# Altium PCB PCB1.PcbDoc
Units mm, origin at the board's own origin, x right, y up, seen from the top; angles counter-clockwise.
Board outline 90 x 47 mm, 2 copper layers (Top Layer, Bottom Layer); 78 components, 46 nets, 190 pads, 86 vias.
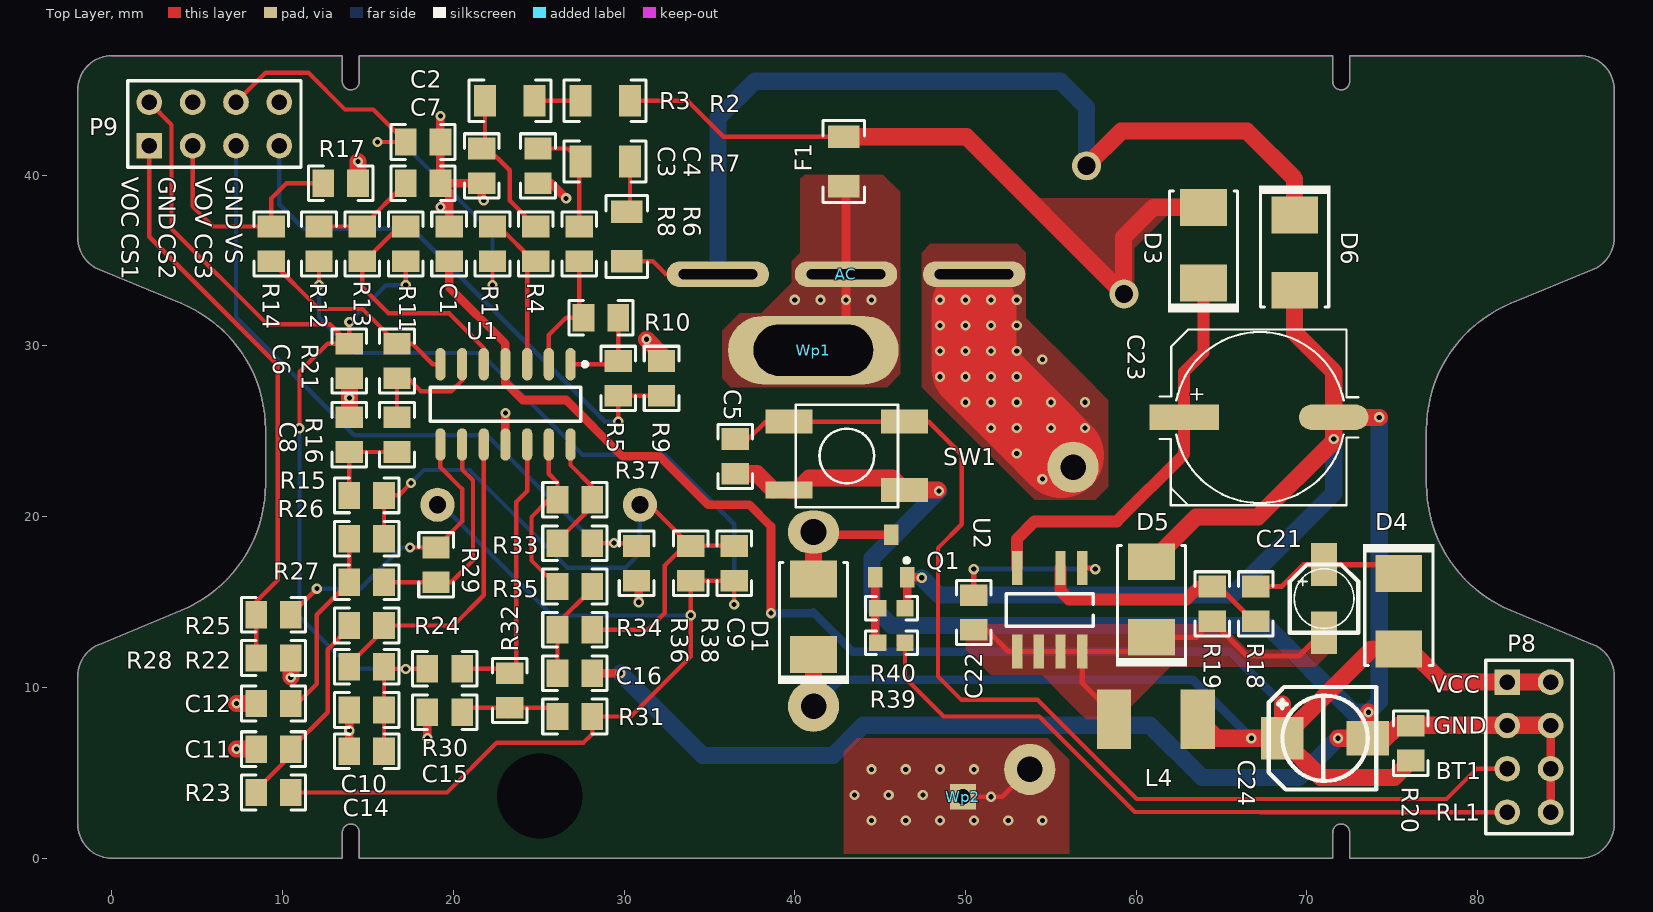
[diagram p0: Top Layer view]
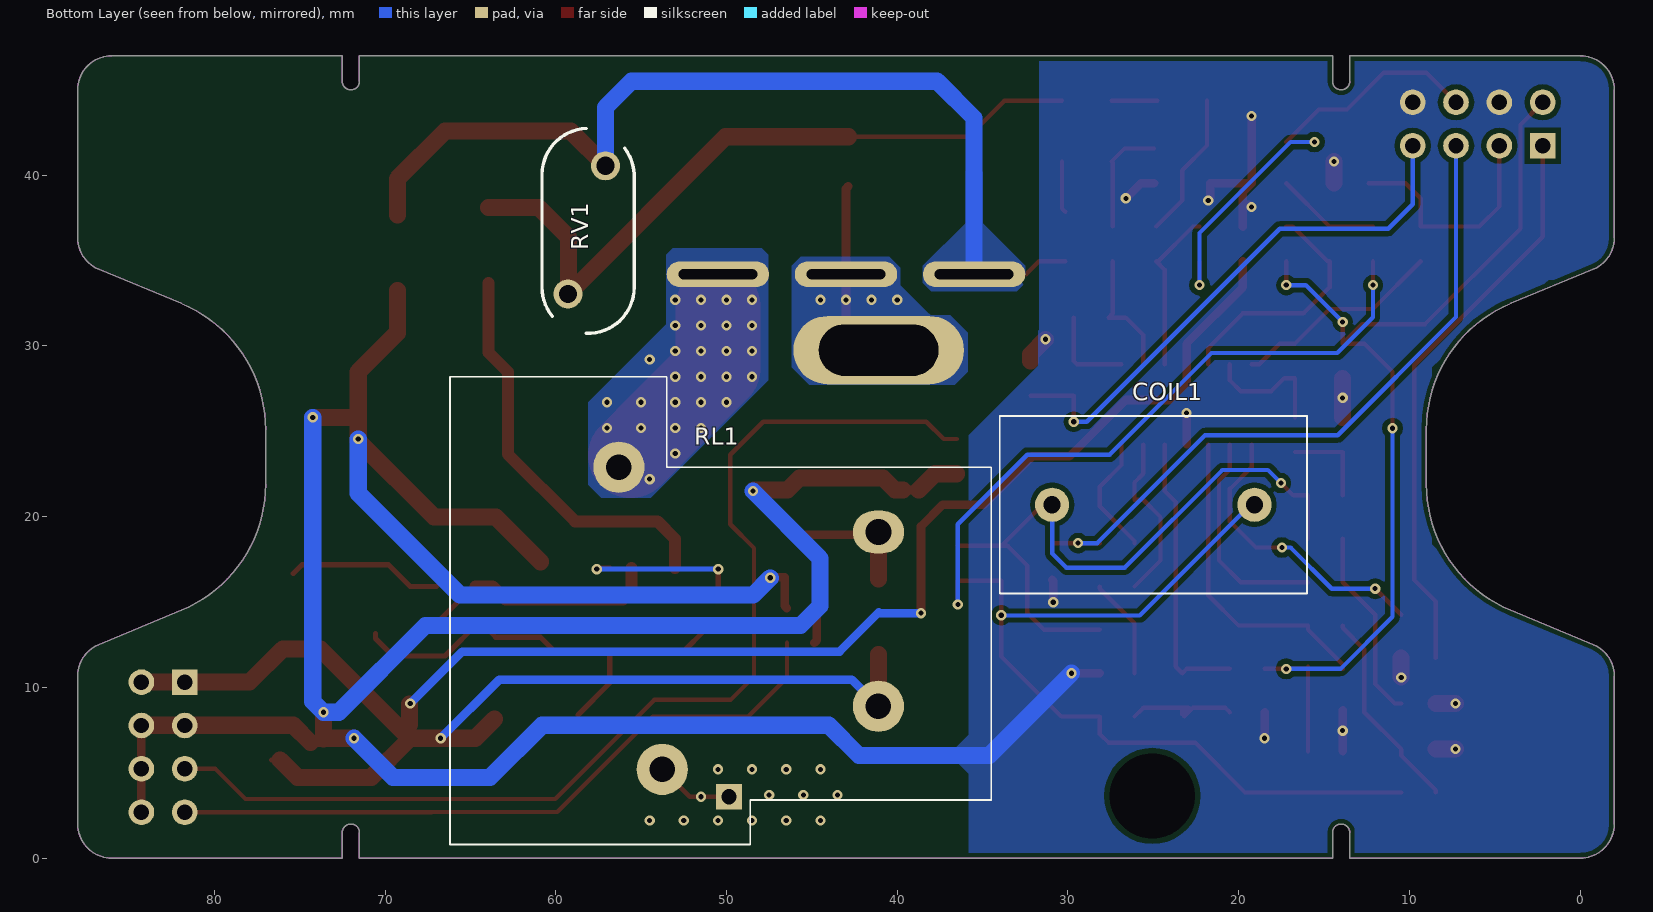
[diagram p1: Bottom Layer view, seen from below]

## Layer stack, top to bottom
Top Solder: solder mask 0.0102, Solder Resist, Dk 3.5
Top Layer: signal copper 0.0356
Dielectric 1: dielectric 0.32, FR-4, Dk 4.8
Bottom Layer: signal copper 0.0356
Bottom Solder: solder mask 0.0102, Solder Resist, Dk 3.5

## Board outline
0,0 cw(c0,2) -2,2 -2,10.664 cw(c0,10.664) -0.765,12.511 4.061,14.511 ccw(c1,21.902) 9,21.902 9,25.098 ccw(c1,25.098) 4.061,32.489 -0.765,34.489 cw(c0,36.336) -2,36.336 -2,45 cw(c0,45) 0,47 13.5,47 13.5,45.5 ccw(c14,45.5) 14.5,45.5 14.5,47 71.5,47 71.5,45.5 ccw(c72,45.5) 72.5,45.5 72.5,47 86,47 cw(c86,45) 88,45 88,36.336 cw(c86,36.336) 86.765,34.489 81.939,32.489 ccw(c85,25.098) 77,25.098 77,21.902 ccw(c85,21.902) 81.939,14.511 86.765,12.511 cw(c86,10.664) 88,10.664 88,2 cw(c86,2) 86,0 72.5,0 72.5,1.5 ccw(c72,1.5) 71.5,1.5 71.5,0 14.5,0 14.5,1.5 ccw(c14,1.5) 13.5,1.5 13.5,0

## Design rules (kind name [scope] priority, off if disabled: settings)
Clearance [All] p1: gap=0.254
HoleSize [All] p1: absolutevalues=TRUE maxlimit=5 minlimit=0.01 maxpercent=80.000 minpercent=20.000
PolygonConnect [All] p1: connectstyle=Direct reliefconductorwidth=0.254 reliefentries=4 polygonreliefangle="90 Angle" airgapwidth=0.254
RoutingVias [All] p1: holewidth=0.3 width=0.6 viastyle="Through Hole" minholewidth=0.3 minwidth=0.6 maxholewidth=5 maxwidth=5
SilkToSilkClearance [All] p1: silktosilkclearance=0.1
SilkToSolderMaskClearance [IsPad] p1: minsilkscreentomaskgap=0.01 clearancetoexposedcopper=TRUE
SolderMaskExpansion [All] p1: expansion=0.102
Width [All] p1: maxlimit=5 minlimit=0.254 preferedwidth=0.254
27 further rules are at their usual default settings.

## Components (designator, comment, footprint, x,y, rotation, side; value= is the part's Value field where it differs from the comment)
AC "Header 3" CHAN3DONG 35.5,34.2 r0 top
C1 "104" 0805_HV 19.752,35.978 r270 top
C2 "104" 0805_HV 18.228,41.947 r180 top
C3 "221" 0805_HV 21.657,40.55 r90 top
C4 "221" 0805_HV 24.959,40.55 r90 top
C5 "221" 0805_HV 36.516,23.532 r90 top
C6 "104" 0805_HV 13.91,29.12 r90 top
C7 "221" 0805_HV 18.228,39.534 r180 top
C8 "221" 0805_HV 13.91,24.802 r270 top
C9 "221" 0805_HV 36.449,17.272 r270 top
C10 "104" 0805_HV 14.926,8.673 r0 top
C11 "221" 0805_HV 9.465,6.387 r0 top
C12 "221" 0805_HV 9.465,9.054 r0 top
C14 "104" 0805_HV 14.926,6.26 r0 top
C15 "221" 0805_HV 19.498,8.546 r0 top
C16 "221" 0805_HV 27.118,10.832 r180 top
C21 "10uF" TU_NHOM_10uF_MH 71,15.2 r180 top
C22 "104" 0805_HV 50.486,14.388 r90 top
C23 "400AX6R8M8x11" PANACAP-G-GENERIC 67.25,25.818 r0 top
C24 "220uF" TU_NHOM_2.5_MH 71.06,7.022 r90 top
COIL1 "Header 2" CURRENT_COIL 30.925,20.698 r180 bottom locked
D1 "US1M-13-F" SMB 41.088,14.134 r270 top
D3 "US1M-13-F" SMB 63.948,35.902 r270 top
D4 "US1M-13-F" SMB 75.378,14.464 r90 top
D5 "US1M-13-F" SMB 60.9,15.15 r270 top
D6 "US1M-13-F" SMB 69.282,35.47 r90 top
F1 "Res" 1206 42.866,40.804 r90 top
L4 "680uF" "Inductor 4.5x5" 60.9,8.038 r180 top
P8 "Header 4X2" HDR2X4 81.73,10.31 r270 top
P9 "Header 4X2" HDR2X4 2.189,41.729 r0 top locked
Q1 "C1815" SOT23B 45.66,17.69 r180 top
R1 "22K" 0805_HV 22.292,35.978 r270 top
R2 "1.2M" 1206 28.896,44.36 r180 top
R3 "1.2M" 1206 23.308,44.36 r180 top
R4 "2.2K" 0805_HV 24.832,35.978 r90 top
R5 "10K" 0805_HV 29.658,28.104 r90 top
R6 "1.2M" 1206 30.166,36.412 r90 top
R7 "1.2M" 1206 28.896,40.804 r180 top
R8 "2.2K" 0805_HV 27.372,35.978 r90 top
R9 "10K" 0805_HV 32.198,28.104 r90 top
R10 "22K" 0805_HV 28.642,31.66 r180 top
R11 "22K" 0805_HV 17.212,35.978 r270 top
R12 "1.2M" 0805_HV 12.132,35.978 r270 top
R13 "2.2K" 0805_HV 14.672,35.978 r90 top
R14 "10K" 0805_HV 9.338,35.978 r270 top
R15 "1.2M" 0805_HV 14.926,21.246 r0 top
R16 "2.2K" 0805_HV 16.704,24.802 r270 top
R17 "10K" 0805_HV 13.402,39.534 r0 top
R18 "13k" 0805_HV 66.996,14.896 r90 top
R19 "2K" 0805_HV 64.456,14.896 r90 top
R20 "3k3" 0805_HV 76.073,6.731 r270 top
R21 "22K" 0805_HV 16.704,29.12 r270 top
R22 "22K" 0805_HV 14.926,11.213 r0 top
R23 "1K" 0805_HV 9.465,3.847 r0 top
R24 "1K" 0805_HV 14.926,13.626 r180 top
R25 "10K" 0805_HV 9.465,14.261 r0 top
R26 "1K" 0805_HV 14.926,18.706 r0 top
R27 "1K" 0805_HV 14.926,16.166 r180 top
R28 "10K" 0805_HV 9.465,11.721 r0 top
R29 "22K" 0805_HV 18.99,17.182 r270 top
R30 "22K" 0805_HV 19.498,11.086 r180 top
R31 "1.2M" 0805_HV 27.118,8.292 r0 top
R32 "2.2K" 0805_HV 23.308,9.816 r270 top
R33 "10K" 0805_HV 27.118,18.452 r180 top
R34 "1.2M" 0805_HV 27.118,13.372 r0 top
R35 "2.2K" 0805_HV 27.118,15.912 r0 top
R36 "10K" 0805_HV 30.734,17.272 r270 top
R37 "22K" 0805_HV 27.118,20.992 r180 top
R38 "1K" 0805_HV 33.909,17.272 r90 top
R39 "1K" 0603 45.66,12.61 r180 top
R40 "10K" 0603 45.66,14.642 r0 top
RL1 "Component_1" RELAY30ASLA12VDC 56.3,22.9 r180 bottom locked
RV1 "S10K275E2" VAR_S10K275E2 58.106,36.74 r270 bottom
SW1 "PB SW" Switch-PB-6.2x6.3mm-SMD 43.047,23.564 r180 top locked
U1 "LM324" D014_L 23.054,26.58 r270 top
U2 "LNK306" "SOP 7" 56.836,17.002 r270 top
Wp1 "Socket" PIN1#1 42.104,50.964 r0 top
Wp2 "Socket" PIN1#2 52.391,-6.567 r0 top

## Footprints (in the part's own frame and the unit in brackets; to place one, negate y for a bottom-side part, rotate by r counter-clockwise, add the part's x,y. Pads: shape width x height; smd on the part's side, far side on the other; paste and mask are expansions set on the pad)
0603 [mm] "0603 from SM-752 data"
  rect 1x0.95 smd: 1(-0.8,0) 2(0.8,0)
  silkscreen extent -1.52,-0.69 1.52,0.69, body extent -0.87,-0.47 0.87,0.47, height 1
0805_HV [mil] "0805 with 30mil clearance between pads"
  rect 50x63 smd: 1(-40,0) 2(40,0)
  silkscreen extent -74,-40 74,40, body extent -43,-29 43,29, height 57
1206 [mm] "1206 from SM-752 data"
  rect 1.3x1.85 smd: 1(1.45,0) 2(-1.45,0)
  silkscreen extent -2.4,-1.21 2.4,1.21, body extent -1.7,-0.9 1.7,0.9, height 1.35
CHAN3DONG [mm]
  oval 6x1.5 hole 0.6 slot 4.6 at 0 deg: 1(0,0) 2(7.5,0) 3(15,0)
CURRENT_COIL [mm]
  round 2 hole 1 paste+0 mask+0: 1(0,0) 2(11.85,0)
  silkscreen extent -3.08,-5.2 14.93,5.2
D014_L [mm] "14-Pin Small Outline Integrated Circuit 1.27 mm Pitch, IPC High Density"
  oval 1.9x0.6 smd: 1(-2.35,3.81) 2(-2.35,2.54) 3(-2.35,1.27) 4(-2.35,0) 5(-2.35,-1.27) 6(-2.35,-2.54) 7(-2.35,-3.81) 8(2.35,-3.81) 9(2.35,-2.54) 10(2.35,-1.27) 11(2.35,0) 12(2.35,1.27) 13(2.35,2.54) 14(2.35,3.81)
  silkscreen extent -2.47,-4.4 1,4.79, body extent -1.95,-4.33 1.95,4.33, height 1.75
HDR2X4 [mm] "Connector; Header; 4x2 Position"
  rect 1.5x1.5 hole 0.9: 1(0,0)
  round 1.5 hole 0.9: 2(0,2.54) 3(2.54,0) 4(2.54,2.54) 5(5.08,0) 6(5.08,2.54) 7(7.62,0) 8(7.62,2.54)
  silkscreen extent -1.27,-1.27 8.89,3.81
"Inductor 4.5x5" [mm]
  rect 2x3.5 smd: 1(2.2,-0.1) 2(-2.7,-0.1)
  body extent -2.6,-2.6 2.2,2.2, height 2
PANACAP-G-GENERIC [mil]
  rect 160x59.06 smd: 1(-175,0)
  oval 160x59.06 smd: 2(170,0)
  silkscreen extent -231,-203 227,203, body extent -233,-203 223,203, height 402
PIN1#1 [mm] "Connector; Plug"
  oval 10x4 hole 3 slot 7 at 0 deg: 1(-1.016,-21.209)
PIN1#2 [mm] "Connector; Plug"
  rect 1.5x1.5 hole 0.9: 1(-2.54,10.16)
RELAY30ASLA12VDC [mm]
  oval 3x2.5 hole 1.5 paste+0 mask+0: 1(15.202,-3.8)
  round 3 hole 1.5 paste+0 mask+0: 2(15.2,-14) 3(2.54,-17.7) 4(0,0)
  silkscreen extent -9.9,-22.1 21.8,5.3
SMB [mm] "Molded Diode, 2-Leads, Body 5.4x3.6mm, IPC Medium Density, based on OnSemi component dimensions"
  rect 2.159x2.743 smd: 1(2.21,0) 2(-2.21,0)
  silkscreen extent -3.18,-2.08 3.94,2.08, body extent -2.7,-1.8 2.7,1.8, height 2.32
"SOP 7" [mm]
  rect 2x0.6 smd: 1(0,0) 2(0,-1.27) 4(0,-3.81) 5(4.9,-3.81) 6(4.9,-2.54) 7(4.9,-1.27) 8(4.9,0)
  silkscreen extent 1.52,-4.44 3.43,0.64
SOT23B [mm] "SOT 23B"
  rect 0.85x1.2 smd: 1(0.95,1.25) 2(0,-1.25) 3(-0.94,1.245)
  silkscreen extent -1.02,0.13 -0.77,0.38, body extent -1.5,-1.2 1.5,1.3, height 1.06
Switch-PB-6.2x6.3mm-SMD [mm]
  rect 2.75x1.4 smd: 1(-3.375,2) 2(-3.375,-2) 2(3.375,-2)
  rect 2.75x1 smd: 1(3.375,2)
  silkscreen extent -3,-3 3,3, body extent -4,-3 4,3.3, height 3.1
TU_NHOM_2.5_MH [mm]
  rect 2.5x2.5 smd: 1(0,2.5)
  rect 2x2.5 smd: 2(0,-2.5)
  silkscreen extent -3,-3 3,3.3, body extent -3.3,-3.5 3.3,3.5, height 8.11
TU_NHOM_10uF_MH [mm]
  rect 1.5x2.5 smd: 1(0,-2) 2(0,2)
  silkscreen extent -2,-2 2,2, body extent -2.15,-2.5 2.15,2.5, height 5.4
VAR_S10K275E2 [mm] "EPCOS"
  round 1.7 hole 1.067: 1(-3.81,1.016) 2(3.69,-1.184)
  silkscreen extent -6,-2.7 6,2.7, body extent -6.02,-2.7 5.98,2.7, height 15

## Part data
AC: "Header, 3-Pin"
C1 C2 C3 C4 C5 C6 C7 C8 C9 C10 C11 C12 C14 C15 C16 C22: library part CM, "Cap SMD"
C21: library part TU_NHOM_10uF_25V_MH, "TU_NHOM_10uF_25V_MH"
C23: "CAP, AL, 6.8uF, 400V, +/-20%, TH"
C24: library part TU_NHOM_220uF_25V_MH, "TU_NHOM_220uF_25V_MH"
COIL1: "Header, 2-Pin"
D1 D3 D4 D5 D6: library part MURS160-13-F, "Diode, Ultrafast, 600V, 1A, SMB"
F1: library part Res-SMD, "Resistor"
L4: library part "Inductor 4.5x5_MH"
P8 P9: "Header, 4-Pin, Dual row"
Q1: "NPN 600mW, ECB"
R1 R2 R3 R4 R5 R6 R7 R8 R9 R10 R11 R12 R13 R14 R15 R16 R17 R18 R19 R20 R21 R22 R23 R24 R25 R26 R27 R28 R29 R30 R31 R32 R33 R34 R35 R36 R37 R38 R39 R40: library part R, "Resistor 1/4W"
RV1: "Varistor 275V RMS 10MM Radial, TH"
SW1: library part Switch-PB-6.2x6.3mm-SMD, "Tactile Switch, SPNO, SMD, 160gf, 6.2x6.3x2.5mm"
U1: library part LM324_MH, "Op x 4"
U2: library part Component_1

## Free pads (board coordinates)
  round 3 hole 5 paste+0 mask+0: 4(25.061,3.644)

## Via types
v1: diameter 0.6, hole 0.3, Top Layer to Bottom Layer, tented both sides, 86 vias

## Nets (pads, with @x,y where several pads share a name; then routed paths per layer and width w, separated by ;. In a path a pad name is that pad's centre, name@x,y a point inside that pad or via, vN(x,y) a via of type N, cw(c..) or ccw(c..) an arc to the next point about the centre after c; other vN are vias at no path point)
BP: C22.2 U2.1 | length 9.4
  Top Layer w0.3: C22.2 v1(50.486,16.928) ; U2.1 57.524,17.002 v1(57.598,16.928)
  Bottom Layer w0.3: v1(50.486,16.928) v1(57.598,16.928)
BUTTON1: C5.2 P8.5 SW1.2 | length 65.1
  Top Layer w0.254: C5.2 37.278,24.548 38.294,25.564 39.672,25.564 46.422,25.564 47.842,25.564 49.784,23.622 49.784,19.558 48.387,18.161 48.387,10.645 49.761,9.271 54.229,9.271 60.034,3.466 78.172,3.466 79.936,5.23 P8.5
C1: R14.2 R21.1 U1.7 | length 12.4
  Top Layer w0.254: R14.2 12.132,32.168 14.672,32.168 R21.1 17.593,30.136 18.799,28.93 U1.7
C2: R25.2 R29.1 U1.8 | length 17.3
  Top Layer w0.254: R25.2 v1(12.005,15.785) ; v1(17.466,18.198) R29.1 20.514,19.722 20.514,21.627 19.244,22.897 U1.8
  Bottom Layer w0.254: v1(12.005,15.785) 14.545,15.785 16.958,18.198 v1(17.466,18.198)
C3: R33.2 R37.1 U1.14 | length 7.1
  Top Layer w0.254: R33.2 26.102,18.579 28.134,20.611 R37.1 28.134,21.754 26.864,23.024 U1.14
CUR_N: C9.1 COIL1.1 R15.2 R26.2 R34.2 R38.2 | length 40.2
  Top Layer w0.254: R26.2 R15.2 16.801,21.246 v1(17.526,21.971) ; R34.2 31.406,13.372 32.385,14.351 32.385,17.145 33.528,18.288 R38.2 ; COIL1.1@30.925,20.637 COIL1.1 31.499,20.698 R38.2 ; C9.1 R38.2
  Bottom Layer w0.254: v1(17.526,21.971) 18.288,22.733 20.955,22.733 26.67,17.018 30.099,17.018 30.925,17.844 COIL1.1 COIL1.1@30.925,21.122
CUR_P: C9.2 COIL1.2 R12.2 R23.2 R31.2 R38.1 | length 91
  Top Layer w0.254: R23.2 19.625,3.847 22.546,6.768 27.626,6.768 28.134,7.276 R31.2 30.39,8.292 33.909,11.811 v1(33.909,14.224) R38.1 C9.2 v1(36.449,14.859) ; v1(12.132,33.565) R12.2 ; COIL1.2@18.781,20.992 COIL1.2
  Bottom Layer w0.254: v1(12.132,33.565) 12.132,31.683 14.224,29.591 21.59,29.591 27.559,23.622 32.385,23.622 36.449,19.558 v1(36.449,14.859) ; COIL1.2 19.307,20.698 25.79,14.215 33.9,14.215 v1(33.909,14.224)
CURRENT_SIGNAL1: P9.1 R25.1 R28.1 | length 33.7
  Top Layer w0.254: P9.1 2.189,36.396 9.719,28.866 9.719,16.293 8.449,15.023 R25.1 R28.1
CURRENT_SIGNAL2: P9.3 R14.1 R17.1 | length 13.7
  Top Layer w0.254: P9.3 4.729,38.174 5.909,36.994 R14.1 9.338,38.645 10.227,39.534 R17.1
CURRENT_SIGNAL3: P9.5 R33.1 R36.1 | length 40.5
  Top Layer w0.254: R33.1 v1(29.404,18.452) 30.801,18.452 R36.1@30.928,18.325
  Bottom Layer w0.254: P9.5 7.269,31.697 14.201,24.765 21.971,24.765 28.284,18.452 v1(29.404,18.452)
FB: R18.1 R19.2 U2.2 | length 14.1
  Top Layer w0.3: R19.2@64.71,15.912 64.837,15.912 66.869,13.88 R18.1
  Top Layer w0.7: U2.2 55.566,15.658 56.074,15.15 62.932,15.15 63.694,15.912 R19.2@64.71,15.912
GND: C1.1 C2.1 C3.1 C4.1 C5.1 C6.1 C7.1 C8.1 C10.1 C11.1 C12.1 C14.1 C15.1 C16.1 C23.2 C24.2 D5.2 D6.2 P8.3 P8.4 P8.6 P8.8 P9.4 P9.8 Q1.3 R9.2 R17.2 R20.1 R28.2 R36.2 R40.2 SW1.1 U1.11 | length 230
  Top Layer w0.5: C14.1 v1(13.91,7.467) C10.1 ; v1(18.482,7.022) C15.1 ; v1(19.244,38.137) 19.371,38.264 19.752,38.264 ; v1(19.244,43.471) C2.1 C7.1 ; C1.1 19.752,38.264 ; v1(21.784,38.518) 21.657,38.645 C3.1 C7.1 ; U1.11 v1(23.054,26.072) ; C4.1 25.721,39.534 v1(26.61,38.645) ; C16.1 v1(29.785,10.832) ; v1(30.861,14.986) 30.861,16.226 R36.2@30.928,16.293 ; SW1.1@38.738,21.564 SW1.1@39.672,21.564 ; R40.2 46.6,14.782 Q1.3 47.413,16.445 v1(47.438,16.42) ; v1@48.39,21.564 v1(48.454,21.5) ; D5.2 61.078,17.36 63.694,19.976 ; C24.2@73.6,6.982 73.814,6.768 C24.2@74.362,6.768 ; P8.8 P8.6 P8.4 ; C7.1 19.752,39.026 19.752,38.264
  Top Layer w1: v1(7.306,6.387) C11.1 ; v1(7.306,9.054) C12.1 ; v1@10.481,10.608 R28.2 ; C8.1 v1(13.91,26.961) C6.1 ; R17.2 v1(14.418,40.804) ; v1(31.309,30.39) 32.198,29.501 R9.2 ; C5.1 37.786,22.516 SW1.1@38.738,21.564 ; SW1.1@39.672,21.564 40.136,21.564 40.834,22.262 45.724,22.262 46.422,21.564 v1@48.39,21.564 ; D5.2 63.516,19.976 63.694,19.976 67.123,19.976 71.568,24.421 v1(71.568,24.548) C23.2 ; D6.2 69.282,30.771 71.568,28.485 C23.2 ; v1(71.822,7.022) C24.2 ; C24.2@73.6,6.982 v1(73.6,8.546) ; v1(74.235,25.818) C23.2 ; C24.2@74.362,6.768 75.378,7.784 76.013,7.784 84.256,7.784 P8.4
  Bottom Layer w1: v1(29.785,10.832) 34.611,6.006 42.231,6.006 44.009,7.784 60.796,7.784 63.844,4.736 69.536,4.736 v1(71.822,7.022) ; v1(47.438,16.42) 48.454,15.404 65.599,15.404 71.568,21.373 v1(71.568,24.548) ; v1(48.454,21.5) 44.517,17.563 44.517,14.769 45.66,13.626 67.631,13.626 72.711,8.546 v1(73.6,8.546) 74.235,9.181 v1(74.235,25.818)
  other v1: 10.481,10.578
L: AC.2 F1.2 Wp1.1 | length 10.4
  Top Layer w0.5: Wp1.1 43,31.667 v1(43,32.7) AC.2 43,39.22 F1.2
  other v1: 40,32.7 41.5,32.7 44.5,32.7
L1: AC.3 RL1.4 | length 10.8
  Top Layer w5: 50.5,32.295 50.5,31.2 50.5,28.7 52,27.2 53.75,25.45 RL1.4@55.617,23.583
  other v1: 54.5,22.2 53,23.7 51.5,25.2 53,25.2 55,25.2 57,25.2 50,26.7 51.5,26.7 53,26.7 55,26.7 57,26.7 48.5,28.2 50,28.2 51.5,28.2 53,28.2 54.5,29.2 48.5,29.7 50,29.7 51.5,29.7 53,29.7 48.5,31.2 50,31.2 51.5,31.2 53,31.2 48.5,32.7 50,32.7 51.5,32.7 53,32.7
LL: D3.2 F1.1 R2.2 RV1.2 | length 42.3
  Top Layer w0.254: R2.2 33.722,44.36 35.828,42.254 F1.1
  Top Layer w1: F1.1 50.052,42.254 59.256,33.05 59.256,36.366 61.002,38.112 D3.2
LOUT: RL1.3 Wp2.1 | length 4.6
  Top Layer w0.254: Wp2.1 v1(51.5,3.593) 52.153,3.593 RL1.3
  other v1: 44.5,2.2 46.5,2.2 48.5,2.2 50.5,2.2 52.5,2.2 54.5,2.2 43.5,3.7 45.5,3.7 47.5,3.7 44.5,5.2 46.5,5.2 48.5,5.2 50.5,5.2
N: AC.1 D6.1 R6.2 RV1.1 | length 57.6
  Top Layer w0.254: R6.2 31.69,34.962 32.452,34.2 AC.1
  Top Layer w1: RV1.1 59.122,42.582 66.488,42.582 69.282,39.788 D6.1
  Bottom Layer w1: AC.1 35.5,43.344 37.659,45.503 55.566,45.503 57.09,43.979 RV1.1
NetC3_2: C3.2 R3.1 R4.2 | length 8.6
  Top Layer w0.254: R3.1 21.858,41.746 23.308,40.296 23.308,38.518 R4.2
NetC4_2: C4.2 R7.1 R8.2 | length 6.5
  Top Layer w0.254: C4.2 26.684,41.566 R7.1 ; R8.2 R7.1@27.372,40.73
NetC7_2: C7.2 R12.1 R13.2 | length 6.1
  Top Layer w0.254: R12.1 R13.2 C7.2
NetC8_2: C8.2 R15.1 R16.2 | length 5.3
  Top Layer w0.254: R15.1 C8.2 R16.2
NetC11_2: C11.2 R23.1 R24.2 | length 12
  Top Layer w0.254: R23.1 8.449,3.974 10.481,6.006 C11.2 12.64,8.546 12.64,12.229 13.91,13.499 R24.2
NetC12_2: C12.2 R26.1 R27.2 | length 11.3
  Top Layer w0.254: C12.2 10.862,9.054 12.005,10.197 12.005,14.261 R27.2 R26.1
NetC15_2: C15.2 R31.1 R32.2 | length 7.3
  Top Layer w0.254: C15.2 20.768,8.8 22.673,8.8 R32.2@23.181,8.292 ; R32.2 23.308,8.419 22.927,8.8 25.594,8.8 R31.1
NetC16_2: C16.2 R34.1 R35.2 | length 5.9
  Top Layer w0.254: C16.2 R34.1 26.102,13.753 28.134,15.785 R35.2
NetC21_1: C21.1 D4.1 R18.2 | length 9.1
  Top Layer w0.3: R18.2 68.52,15.912 69.79,17.182 74.87,17.182 D4.1
NetD1_2: D1.2 Q1.2 RL1.1 | length 7.4
  Top Layer w0.5: D1.2 D1.2@41.098,16.354 ; RL1.1 41.258,18.94 Q1.2
  Top Layer w1: D1.2@41.098,16.354 RL1.1
NetQ1_1: Q1.1 R39.2 R40.1 | length 3.9
  Top Layer w0.5: Q1.1 44.71,12.76 R39.2
NetR1_1: R1.1 R4.1 U1.3 | length 9.6
  Top Layer w0.254: R1.1 22.673,36.994 24.705,34.962 R4.1 24.324,34.454 U1.3
NetR2_1: R2.1 R3.2 | length 2.7
  Top Layer w0.254: R3.2 R2.1
NetR6_1: R6.1 R7.2 | length 3
  Top Layer w0.254: R6.1 30.346,38.042 R7.2
NetR8_1: R8.1 R10.2 U1.2 | length 7.6
  Top Layer w0.254: U1.2 25.594,30.644 26.61,31.66 R10.2 27.372,31.914 R8.1
NetR11_1: R11.1 R13.1 U1.5 | length 14.4
  Top Layer w0.254: R11.1 16.831,36.994 14.799,34.962 R13.1 14.672,33.438 16.196,31.914 19.752,31.914 21.784,29.882 U1.5
NetR16_1: R16.1 R21.2 U1.6 | length 7.6
  Top Layer w0.254: R16.1 R21.2 17.339,28.104 18.101,27.342 19.879,27.342 20.514,27.977 U1.6
NetR22_1: R22.1 R24.1 U1.10 | length 18.8
  Top Layer w0.254: R22.1@13.91,11.086 13.91,11.34 15.942,13.372 R24.1 20.006,13.626 21.784,15.404 U1.10
NetR27_1: R27.1 R29.2 U1.9 | length 12.8
  Top Layer w0.254: R27.1 R29.2 19.879,16.166 21.149,17.436 21.149,22.135 20.514,22.77 U1.9
NetR30_1: R30.1 R32.1 U1.12 | length 16.7
  Top Layer w0.254: R30.1 23.054,11.086 R32.1 23.689,11.213 23.689,20.865 24.324,21.5 U1.12
NetR35_1: R35.1 R37.2 U1.13 | length 10.1
  Top Layer w0.254: U1.13 25.594,22.516 26.102,22.008 R37.2 25.594,20.992 24.578,19.976 24.578,17.436 R35.1
RL1C: P8.7 R39.1 | length 40.6
  Top Layer w0.254: R39.1 46.46,10.563 48.731,8.292 54.319,8.292 59.907,2.704 67.25,2.704 67.264,2.69 P8.7
S: C21.2 C22.1 D5.1 L4.1 R19.1 U2.5 U2.6 U2.7 U2.8 | length 27.4
  Top Layer w0.3: C22.1 51.248,13.372 52.518,12.102 U2.5 U2.6 U2.7 U2.8 ; L4.1@58.7,8.392 56.836,10.256 U2.8 ; C21.2@70.552,13.15 70.552,12.864 69.536,11.848 66.488,11.848 R19.1 63.516,12.94 D5.1 60.062,12.102 U2.8
V1: R5.2 R10.1 U1.1 | length 5.4
  Top Layer w0.254: U1.1 29.468,28.93 R5.2 R10.1
VCC_RELAY: C1.2 C24.1 D1.1 D4.2 L4.2 P8.1 P8.2 R20.2 RL1.2 U1.4 | length 130.5
  Top Layer w0.3: L4.2@63.6,8.392 L4.2@63.727,8.265 ; v1(68.52,9.054) v1@68.56,9.014 ; R20.2@76.14,5.752 R20.2@76.648,5.752
  Top Layer w0.5: C1.2 19.752,33.438 23.054,30.136 U1.4 23.054,27.85 24.07,26.834 26.61,26.834 29.912,23.532 32.088,23.532 34.925,20.695 37.344,20.695 38.608,19.431 v1(38.608,14.351) ; RL1.2@41.088,8.912 RL1.2
  Top Layer w1: RL1.2@41.088,8.912 D1.1 ; L4.2 64.716,7.022 v1(66.742,7.022) C24.1 ; C24.1@68.56,7.824 v1@68.56,9.014 ; R20.2@76.14,5.752 75.124,4.736 70.806,4.736 68.56,6.982 C24.1 ; P8.2 P8.1 77.932,10.31 75.988,12.254 D4.2 73.792,12.254 C24.1
  Bottom Layer w0.5: v1(38.608,14.351) 41.051,14.351 41.088,14.388 43.374,12.102 65.472,12.102 v1(68.52,9.054) ; RL1.2 42.651,10.451 63.313,10.451 v1(66.742,7.022)
VIN1: C23.1 D3.1 U2.4 | length 24
  Top Layer w0.7: U2.4 53.026,18.706 54.042,19.722 58.868,19.722 62.805,23.659 C23.1 62.805,28.485 63.948,29.628 D3.1
VOFFSET_CURRENT: C6.2 C10.2 C14.2 P9.2 R11.2 R22.2 R30.2 | length 60.9
  Top Layer w0.254: P9.2 3.496,42.963 3.496,36.867 9.084,31.279 12.767,31.279 C6.2 ; v1(10.989,25.183) 10.989,28.485 12.64,30.136 C6.2 ; v1(13.91,31.406) C6.2 ; C14.2 C10.2 R22.2@15.942,11.086 ; R22.2 R22.2@15.942,11.086 ; v1(17.212,33.565) R11.2 ; R30.2 v1(17.212,11.086) R22.2@15.942,11.086
  Bottom Layer w0.254: v1(10.989,25.183) 10.989,14.134 14.037,11.086 v1(17.212,11.086) ; v1(13.91,31.406) 16.069,33.565 v1(17.212,33.565)
VOFFSET_VOL: C2.2 P9.6 R1.2 | length 27.4
  Top Layer w0.254: P9.6 9.011,46.011 11.497,46.011 13.656,43.852 15.307,43.852 C2.2 v1(15.561,41.947) ; v1(22.292,33.565) R1.2
  Bottom Layer w0.254: v1(15.561,41.947) 16.958,41.947 22.292,36.613 v1(22.292,33.565)
VOL_SIGNAL: P9.7 R5.1 R9.1 | length 32.6
  Top Layer w0.254: v1(29.658,25.564) R5.1 R9.1
  Bottom Layer w0.254: P9.7 9.809,38.301 11.243,36.867 17.593,36.867 28.896,25.564 v1(29.658,25.564)

## Polygon pours and split planes (outlines as drawn)
S on Top Layer "Bottom Layer-No Net" (solid, remove dead copper, pour order 27): 50,13.7 50,12.2 50.5,11.7 51.5,10.7 53,10.7 54.5,10.7 56.5,8.7 57.062,8.138 58.7,8.138 58.938,8.138 60.5,9.7 62,11.2 67,11.2 70.5,11.2 71.5,12.2 71.5,12.7 70.716,12.7 70.552,12.864 69.888,12.2 68.5,12.2 66.5,12.2 65.5,13.2 65,13.7 61.5,13.7 50,13.7
LL on Top Layer "Bottom Layer-No Net" (solid, remove dead copper, pour order 19): 62.678,38.645 53.915,38.645 53.915,37.756 54.55,37.121 58.614,33.057 59.884,33.057 59.884,35.724 61.281,37.121 61.789,37.629 62.678,37.629
LOUT on Top Layer "Bottom Layer-No Net" (solid, remove dead copper, pour order 9): 56.074,3.466 56.074,5.752 55.058,6.768 54.804,7.022 53.28,7.022 43.628,7.022 42.866,6.26 42.866,0.418 42.866,0 56.074,0
L1 on Top Layer "Bottom Layer-No Net" (solid, remove dead copper, pour order 7): 47.438,35.47 47.438,33.946 47.438,28.358 47.438,27.596 48.962,26.072 54.042,20.992 56.074,20.992 57.598,20.992 58.36,21.754 58.36,25.818 58.36,26.834 56.836,28.358 53.534,31.66 53.534,34.454 53.534,35.47 53.026,35.978 47.946,35.978
L on Top Layer "Bottom Layer-No Net" (solid, remove dead copper, pour order 4): 40.326,35.47 39.818,34.962 39.818,33.692 38.548,32.422 38.04,31.914 37.278,31.914 36.77,31.914 36.008,31.152 35.754,30.898 35.754,28.358 35.754,28.104 36.262,27.596 39.818,27.596 45.406,27.596 46.168,28.358 46.168,31.152 46.168,39.026 45.152,40.042 42.866,40.042 40.58,40.042 40.326,39.788 40.326,38.264
N on Bottom Layer "Bottom Layer-No Net" (solid, remove dead copper, pour order 25): 33,33.7 32.5,34.2 32.5,34.7 34,36.2 35,37.2 35,40.2 36,40.2 36,37.2 38.5,34.7 38.5,33.7 38,33.2 33,33.2 32.5,33.7
L1 on Bottom Layer "Bottom Layer-No Net" (solid, remove dead copper, pour order 23): 47.565,35.343 47.565,27.977 48.962,26.58 54.423,21.119 56.709,21.119 57.344,21.119 57.979,21.754 58.106,21.881 58.106,25.183 58.106,26.707 54.296,30.517 53.534,31.279 53.534,34.962 53.534,35.343 53.153,35.724 47.946,35.724
L on Bottom Layer "Bottom Layer-No Net" (solid, remove dead copper, pour order 21): 42.231,35.216 40.707,35.216 40.453,35.216 40.072,34.835 39.818,34.581 39.818,33.692 39.818,33.565 38.294,32.041 38.04,31.787 37.532,31.787 36.897,31.787 36.516,31.406 35.881,30.771 35.881,29.247 35.881,28.485 36.262,28.104 36.643,27.723 38.167,27.723 45.152,27.723 45.533,28.104 46.168,28.739 46.168,30.517 46.168,34.708 45.66,35.216
GND on Bottom Layer "Bottom Layer-No Net" (solid, remove dead copper, pour order 15): 13.5,47.069 13.486,47.054 -0.196,47.054 -0.378,47.054 -0.392,47.04 -0.506,46.925 -0.769,46.925 -0.85,46.925 -0.943,46.833 -1.036,46.74 -1.117,46.74 -1.144,46.74 -1.269,46.615 -1.671,46.213 -1.671,46.185 -1.671,46.104 -1.764,46.011 -1.764,45.931 -1.857,45.838 -1.914,45.781 -1.914,45.649 -1.914,45.518 -1.971,45.461 -2,45.432 -2,44.937 -2,36.223 -1.986,36.209 -1.914,36.137 -1.914,35.824 -1.914,35.693 -1.857,35.636 -1.546,35.325 -1.546,35.136 -1.519,35.136 -1.117,34.734 -1.024,34.641 -0.943,34.641 -0.621,34.641 -0.375,34.396 -0.297,34.318 -0.187,34.318 0.036,34.318 0.194,34.16 0.466,33.888 1.21,33.888 1.845,33.888 2.226,33.507 2.888,32.845 3.369,32.845 4.018,32.845 4.477,32.386 4.911,31.951 5.263,31.951 5.476,31.951 5.996,31.431 8.687,28.74 8.687,27.382 8.687,18.397 7.265,16.975 5.476,15.186 5.263,15.186 5.087,15.186 4.87,14.969 4.358,14.457 3.765,14.457 3.623,14.457 3.242,14.076 3.115,13.949 2.607,13.949 2.132,13.949 1.845,13.661 1.477,13.293 0.956,13.293 0.626,13.293 0.392,13.06 -0.087,12.58 -0.765,12.58 -0.967,12.58 -1.269,12.278 -1.857,11.69 -1.857,11.501 -1.857,1.3 -1.546,0.989 -1.546,0.8 -1.269,0.523 -0.901,0.155 -0.581,0.155 0.108,0.155 0.194,0.069 13.5,0.069 13.515,0.083 13.515,1.666 13.529,1.681 13.529,1.764 13.529,1.791 13.722,1.984 13.797,2.059 13.902,2.059 14.203,2.059 14.416,1.846 14.5,1.762 14.5,1.503 14.5,0.069 33.378,0.069 33.468,-0.021 33.558,0.069 34.23,0.069 34.23,4.805 34.611,5.186 35.246,5.821 35.246,6.075 35.246,6.202 33.849,7.599 31.69,9.758 31.69,34.904 31.69,47.069
GND on Bottom Layer "Bottom Layer-No Net" (solid, remove dead copper, pour order 11): 31.75,30.988 31.75,29.718 31.75,28.829 33.02,27.559 35.814,24.765 35.814,19.05 35.814,7.239 36.576,6.477 36.576,5.715 36.195,5.334 35.814,4.953 35.814,3.048 35.814,-0.037 30.861,-0.037 30.861,12.573 25.019,18.415 26.162,19.558 26.162,30.607

## Keep-outs
Keep-Out Layer:
  the board outline again, w0.013

## Silkscreen, mask and mechanical layers (free items; w line width, h text height)
Top Overlay:
  text "VOC" at 0.575,39.915 h1 r270
  text "GND" at 2.734,39.915 h1 r270
  text "VOV" at 4.893,39.915 h1 r270
  text "GND" at 6.671,39.915 h1 r270
  text "CS1" at 0.575,36.613 h1 r270
  text "CS2" at 2.734,36.613 h1 r270
  text "CS3" at 4.893,36.613 h1 r270
  text "VS" at 6.671,36.613 h1 r270
  text "VCC" at 77.283,9.689 h1
  text "GND" at 77.41,7.276 h1
  text "BT1" at 77.537,4.609 h1
  text "RL1" at 77.537,2.196 h1
Top Solder:
  lines w5: 40.58,30.644 42.358,32.422 ; 43.374,31.406 43.374,32.422 ; 45.66,3.72 53.026,3.72 ; 50.486,32.422 50.486,28.866 55.566,23.786
Mechanical 1:
  circle w0.013: c30.925,20.7 r0.45
  circle w0.013: c19.075,20.7 r0.45
  circle w0.013: c2.19,44.27 r0.4
  circle w0.013: c7.27,41.73 r0.4
  circle w0.013: c4.73,41.73 r0.4
  circle w0.013: c2.19,41.73 r0.4
  circle w0.013: c9.81,41.73 r0.4
  circle w0.013: c9.81,44.27 r0.4
  circle w0.013: c7.27,44.27 r0.4
  circle w0.013: c4.73,44.27 r0.4
  circle w0.013: c84.27,10.31 r0.4
  circle w0.013: c81.73,5.23 r0.4
  circle w0.013: c81.73,7.77 r0.4
  circle w0.013: c81.73,10.31 r0.4
  circle w0.013: c81.73,2.69 r0.4
  circle w0.013: c84.27,2.69 r0.4
  circle w0.013: c84.27,5.23 r0.4
  circle w0.013: c84.27,7.77 r0.4
  circle w0.013: c56.3,22.9 r0.85
  circle w0.013: c41.1,8.9 r0.4
  circle w0.013: c53.76,5.2 r0.85
  circle w0.013: c41.1,19.1 r0.4
  lines w0.013: 38.85,36 cw(c35.5,36) 32.15,36 32.15,47.8 31.35,47.8 31.35,36 ccw(c35.5,36) 39.65,36 ; 38.85,36 ccw(c43,36) 47.15,36 ; 38.85,36 38.85,47.8 39.65,47.8 39.65,36 ; 39.65,36 ccw(c43,36) 46.35,36 ; 46.35,36 ccw(c50.5,36) 54.65,36 54.65,47.8 53.85,47.8 53.85,36 cw(c50.5,36) 47.15,36 ; 46.35,36 46.35,47.8 ; 46.35,36 46.35,47.8 ; 46.35,47.8 47.15,47.8 ; 47.15,36 47.15,47.8 ; 47.15,36 47.15,47.8 ; 0.65,40.5 11.35,40.5 11.35,45.5 0.65,45.5 0.65,40.5 ; 5,-0.353 9,-0.353 9,0.614 5,0.614 5,-0.353 ; 5,46.386 5,47.353 9,47.353 9,46.386 5,46.386 ; 13.5,1.5 14.5,1.5 14.5,3 13.5,3 13.5,1.5 ; 13.5,44 13.5,45.5 14.5,45.5 14.5,44 13.5,44 ; 16,15.5 34,15.5 34,25.9 16,25.9 16,15.5 ; 33.6,33.925 cw(c33.6,34.2) 33.6,34.475 37.4,34.475 cw(c37.4,34.2) 37.4,33.925 33.6,33.925 ; 34.5,3.4 34.5,22.9 53.5,22.9 53.5,28.2 66.2,28.2 66.2,0.8 48.6,0.8 48.6,3.4 34.5,3.4 ; 38.7,21 41.5,21 41.5,22 38.7,22 38.7,21 ; 38.7,25 38.7,26 41.5,26 41.5,25 38.7,25 ; 41.1,33.925 cw(c41.1,34.2) 41.1,34.475 44.9,34.475 cw(c44.9,34.2) 44.9,33.925 41.1,33.925 ; 42.5,-0.325 42.5,1 43.5,1 43.5,-0.325 42.5,-0.325 ; 44.5,21 44.5,22 47.3,22 47.3,21 44.5,21 ; 44.5,25 44.5,26 47.3,26 47.3,25 44.5,25 ; 48.6,33.925 cw(c48.6,34.2) 48.6,34.475 52.4,34.475 cw(c52.4,34.2) 52.4,33.925 48.6,33.925 ; 71.5,1.5 71.5,3 72.5,3 72.5,1.5 71.5,1.5 ; 71.5,44 72.5,44 72.5,45.5 71.5,45.5 71.5,44 ; 77,-0.353 77,0.614 81,0.614 81,-0.353 77,-0.353 ; 77,46.386 81,46.386 81,47.353 77,47.353 77,46.386 ; 80.5,1.15 80.5,11.85 85.5,11.85 85.5,1.15 80.5,1.15
  lines w0.1: 35.5,33.925 35.5,34.475

## Text inside footprints (layer, text, board x,y; h text height)
C23: Top Overlay "+" at 63.05,26.793 h0.89